# Allegro board GALVO_DRV.brd
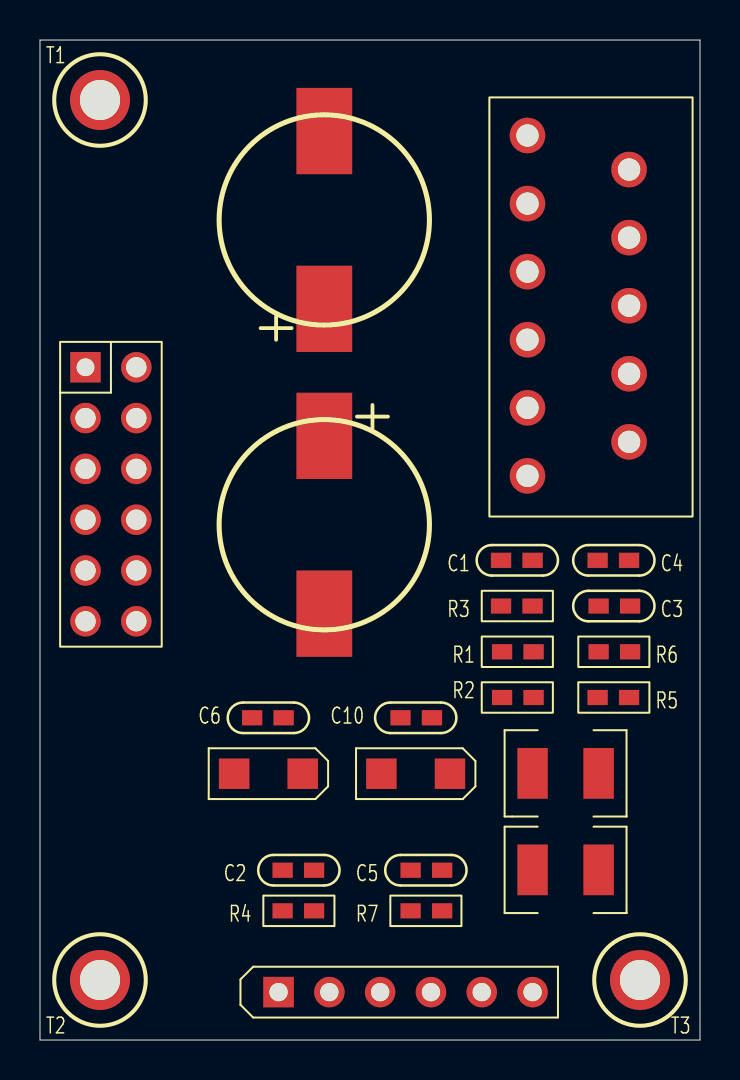
[diagram p0: board, top side]
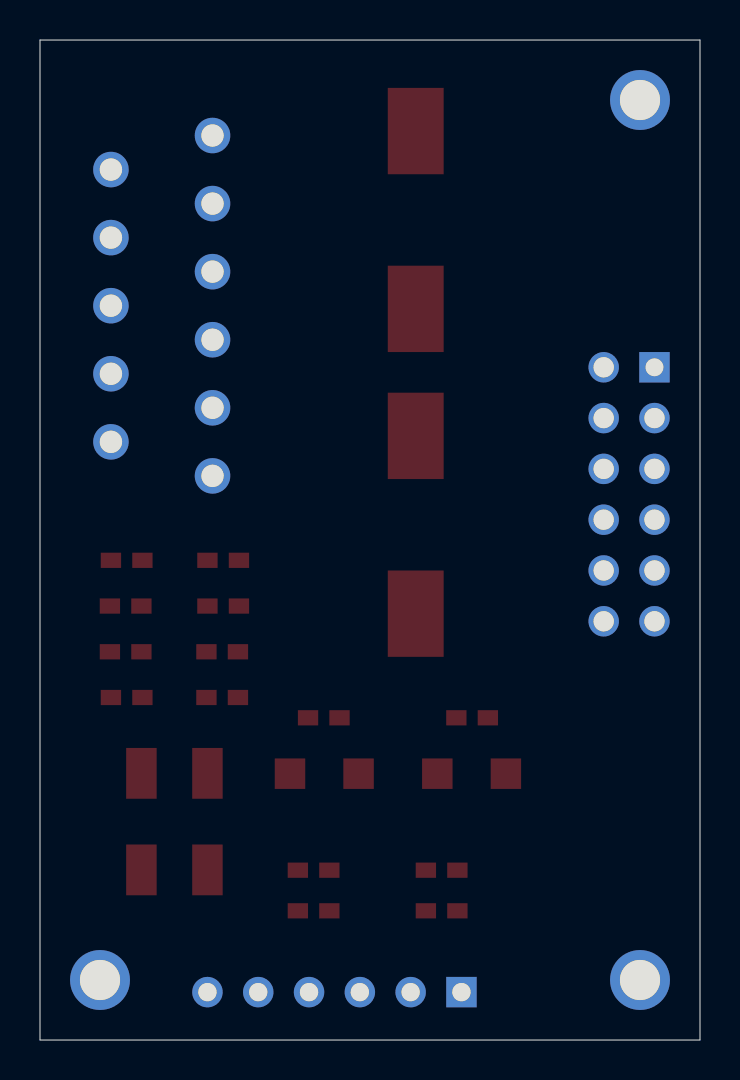
[diagram p1: board, bottom side, seen from below]

Outline 33 x 50 mm; copper layers: TOP, BOTTOM. Coordinates in mm from the lower left corner of the outline.
Outline path: 0,50 33,50 33,0 0,0 0,50

## Placement (name value [footprint] x y rotation side)
C1  15pF  [0603C]  24.63 23.98 180 top
C2  0.1uF  [0603C]  13.71 8.49 180 top
C3  220pF  [0603C]  27.93 21.7 0 top
C4  220pF  [0603C]  29.45 23.98 180 top
C5  0.1uF  [0603C]  18.53 8.49 0 top
C6  0.1uF  [0603C]  12.18 16.11 180 top
C7  220uF  [C_SMD_ALUELE_D10]  14.21 41 90 top
C8  10uF  [1206]  11.42 13.32 180 top
C9  220uF  [C_SMD_ALUELE_D10]  14.21 25.76 270 top
C10  0.1uF  [0603C]  18.02 16.11 0 top
C11  10uF  [1206]  18.79 13.32 180 top
J1  DRV_IF  [IDC12]  3.55 26.02 0 top
J2  TO_MOTOR  [SIP6]  11.93 2.39 90 top
R1  1K  [0603R]  23.1 19.41 0 top
R2  33K  [0603R]  23.1 17.13 0 top
R3  2K  [0603R]  24.63 21.7 180 top
R4  680  [0603R]  13.71 6.46 180 top
R5  1K  [0603R]  29.45 17.13 180 top
R6  0  [0603R]  27.93 19.41 0 top
R7  10  [0603R]  18.53 6.46 0 top
R8  0.1  [1210]  26.28 8.51 180 top
R9  0.1  [1210]  26.28 13.33 180 top
T1  HOLE  [HOLE_D2MM]  3 47 0 top
T2  HOLE  [HOLE_D2MM]  3 3 0 top
T3  HOLE  [HOLE_D2MM]  30 3 0 top
U1  LM3886/TO220  [TO220-11]  24.37 45.22 270 top

## Library data of the parts
C1-C6 C10 = CAP NP
C7-C9 C11 = CAP POL
J1 = HEADER 6X2
J2 = CON6: User Part Number: ***
R1-R9 = R
T1-T3 = CON1
U1 = LM3886/TO220_4

## Footprints (pads in the part's own frame, mm; a bottom-side part is the same pattern mirrored in y, then rotated)
0603C
  rect 1.016x0.762 smd: 1(0,0) 2(1.575,0)
0603R
  rect 1.016x0.762 smd: 1(0,0) 2(1.575,0)
1206
  rect 1.524x1.524 smd: 1(-1.714,0) 2(1.714,0)
1210
  rect 1.524x2.54 smd: 1(-1.651,0) 2(1.651,0)
C_SMD_ALUELE_D10
  rect 4.318x2.794 smd: 1(-4.445,0) 2(4.445,0)
HOLE_D2MM
  round 2.997 hole 2.007: 1(0,0)
IDC12
  rect 1.524x1.524 hole 0.889: 1(-1.27,7.62)
  round 1.524 hole 1.016: 2(1.27,7.62) 3(-1.27,5.08) 4(1.27,5.08) 5(-1.27,2.54) 6(1.27,2.54) 7(-1.27,0) 8(1.27,0) 9(-1.27,-2.54) 10(1.27,-2.54) 11(-1.27,-5.08) 12(1.27,-5.08)
SIP6
  rect 1.524x1.524 hole 0.914: 1(0,0)
  round 1.524 hole 0.914: 2(0,-2.54) 3(0,-5.08) 4(0,-7.62) 5(0,-10.16) 6(0,-12.7)
TO220-11
  round 1.778 hole 1.118: 1(0,0) 2(1.702,5.08) 3(3.404,0) 4(5.105,5.08) 5(6.807,0) 6(8.509,5.08) 7(10.211,0) 8(11.913,5.08) 9(13.614,0) 10(15.316,5.08) 11(17.018,0)

## Nets
AGND: C2.1 J1.10 R4.1
PGND: C3.1 C5.2 C6.2 C7.2 C8.2 C9.1 C10.2 C11.1 J1.3 J1.4 R2.1 R5.1 R6.1 R8.1 R9.1 U1.7(GND)
CUR_SAMP: J1.8 J2.6 R8.2 R9.2
LED_DRV: J2.2 R4.2
M_POS1: J1.11 J2.3
M_POS2: J1.12 J2.4
MOTOR_VDRV: J1.7 R1.1
VAA12VP: C2.2 J1.9 J2.1
VPP: C6.1 C7.1 C8.1 J1.1 J1.2 U1.1(+VCC1) U1.5(+VCC5)
VPPN: C9.2 C10.1 C11.2 J1.5 J1.6 U1.4(-VCC)
N41724: C3.2 C4.1 R1.2 R2.2 U1.10(+VIN)
N41785: C1.1 C4.2 R3.1 R5.2 U1.9(-VIN)
N41807: C1.2 J2.5 R3.2 R7.2 U1.3(OUT)
N128992: R6.2 U1.8(MUTE)
N131947: C5.1 R7.1

Pads without a net: T1 1; T2 1; T3 1; U1 2 6 11
